# EAGLE board CT_schematic (EAGLE 7.6.0)

Size 100 x 80 mm. Coordinates in mm from the lower left corner, seen from the top.
Outline: 0,0 100,0 100,80 0,80 0,0
Copper layers (1*16): Top 0.035mm / dielectric 1.5mm / Bottom 0.035mm
Design rules "default": minimum track width 10mil, minimum drill 24mil, track to track 8mil, track to pad 8mil, pad to pad 8mil, via to via 8mil, smd to smd 8mil, copper to edge 40mil, drill to drill 8mil, minimum pad ring 10mil, minimum via ring 8mil, stop-mask expansion 4mil, vias tented up to drill 0mil, thermal gap 10mil

## Footprints (pad centres in the part's own frame; a part is rotated, then mirrored left to right if it is on the bottom)
C0603 = smd 0.8 x 0.8: 1 -0.762,0; 2 0.762,0
C0402 = smd 0.5 x 0.5: 1 -0.508,0; 2 0.508,0
C1210 = smd 1.2 x 2.5: 1 -1.524,0; 2 1.524,0
C0805 = smd 1.2 x 1.3: 1 -1.016,0; 2 1.016,0
R0603 = smd 0.8 x 0.8: 1 -0.762,0; 2 0.762,0
EXV-9H = smd 3.505 x 1.676: 1 -2.857,0; 2 2.857,0
PJ-037B_PACKAGE = drill 3.7 square: 1 12,0 | drill 3.2 square: 2 6,0
LQFP144 = smd 0.35 x 1.35: 1 -8.75,-10.625; 2 -8.25,-10.625; 3 -7.75,-10.625; 4 -7.25,-10.625; 5 -6.75,-10.625; 6 -6.25,-10.625; 7 -5.75,-10.625; 8 -5.25,-10.625; 9 -4.75,-10.625; 10 -4.25,-10.625; 11 -3.75,-10.625; 12 -3.25,-10.625; 13 -2.75,-10.62; 14 -2.25,-10.625; 15 -1.75,-10.625; 16 -1.25,-10.625; 17 -0.75,-10.625; 18 -0.25,-10.625; 19 0.25,-10.625; 20 0.75,-10.625; 21 1.25,-10.625; 22 1.75,-10.625; 23 2.25,-10.625; 24 2.75,-10.62; 25 3.25,-10.625; 26 3.75,-10.625; 27 4.25,-10.625; 28 4.75,-10.625; 29 5.25,-10.625; 30 5.75,-10.625; 31 6.25,-10.625; 32 6.75,-10.625; 33 7.25,-10.625; 34 7.75,-10.625; 35 8.25,-10.625; 36 8.75,-10.625; 73 8.75,10.625; 74 8.25,10.625; 75 7.75,10.625; 76 7.25,10.625; 77 6.75,10.625; 78 6.25,10.625; 79 5.75,10.625; 80 5.25,10.625; 81 4.75,10.625; 82 4.25,10.625; 83 3.75,10.625; 84 3.25,10.625; 85 2.75,10.625; 86 2.25,10.625; 87 1.75,10.625; 88 1.25,10.625; 89 0.75,10.625; 90 0.25,10.625; 91 -0.25,10.625; 92 -0.75,10.625; 93 -1.25,10.625; 94 -1.75,10.625; 95 -2.25,10.625; 96 -2.75,10.625; 97 -3.25,10.625; 98 -3.75,10.625; 99 -4.25,10.625; 100 -4.75,10.625; 101 -5.25,10.625; 102 -5.75,10.625; 103 -6.25,10.625; 104 -6.75,10.625; 105 -7.25,10.625; 106 -7.75,10.625; 107 -8.25,10.625; 108 -8.75,10.625 | smd 1.35 x 0.35: 37 10.625,-8.75; 38 10.625,-8.25; 39 10.625,-7.75; 40 10.625,-7.25; 41 10.625,-6.75; 42 10.625,-6.25; 43 10.625,-5.75; 44 10.625,-5.25; 45 10.625,-4.75; 46 10.625,-4.25; 47 10.625,-3.75; 48 10.625,-3.25; 49 10.625,-2.75; 50 10.625,-2.25; 51 10.625,-1.75; 52 10.625,-1.25; 53 10.625,-0.75; 54 10.625,-0.25; 55 10.625,0.25; 56 10.625,0.75; 57 10.625,1.25; 58 10.625,1.75; 59 10.625,2.25; 60 10.625,2.75; 61 10.625,3.25; 62 10.625,3.75; 63 10.625,4.25; 64 10.625,4.75; 65 10.625,5.25; 66 10.625,5.75; 67 10.625,6.25; 68 10.625,6.75; 69 10.625,7.25; 70 10.625,7.75; 71 10.625,8.25; 72 10.625,8.75; 109 -10.625,8.75; 110 -10.625,8.25; 111 -10.625,7.75; 112 -10.625,7.25; 113 -10.625,6.75; 114 -10.625,6.25; 115 -10.625,5.75; 116 -10.625,5.25; 117 -10.625,4.75; 118 -10.625,4.25; 119 -10.625,3.75; 120 -10.625,3.25; 121 -10.625,2.75; 122 -10.625,2.25; 123 -10.625,1.75; 124 -10.625,1.25; 125 -10.625,0.75; 126 -10.625,0.25; 127 -10.625,-0.25; 128 -10.625,-0.75; 129 -10.625,-1.25; 130 -10.625,-1.75; 131 -10.625,-2.25; 132 -10.625,-2.75; 133 -10.625,-3.25; 134 -10.625,-3.75; 135 -10.625,-4.25; 136 -10.625,-4.75; 137 -10.625,-5.25; 138 -10.625,-5.75; 139 -10.625,-6.25; 140 -10.625,-6.75; 141 -10.625,-7.25; 142 -10.625,-7.75; 143 -10.625,-8.25; 144 -10.625,-8.75
LGA14R35P5X6_200X200X100 = smd 0.35 x 0.15: 1 -0.8,0.525; 2 -0.8,0.175; 3 -0.8,-0.175; 4 -0.8,-0.525; 8 0.8,-0.525; 9 0.8,-0.175; 10 0.8,0.175; 11 0.8,0.525 | smd 0.15 x 0.35: 5 -0.35,-0.8; 6 0,-0.8; 7 0.35,-0.8; 12 0.35,0.8; 13 0,0.8; 14 -0.35,0.8
VFBGA48 = smd 0.35 x 0.35: A1 -1.875,2.625; A2 -1.125,2.625; A3 -0.375,2.625; A4 0.375,2.625; A5 1.125,2.625; A6 1.875,2.625; B1 -1.875,1.875; B2 -1.125,1.875; B3 -0.375,1.875; B4 0.375,1.875; B5 1.125,1.875; B6 1.875,1.875; C1 -1.875,1.125; C2 -1.125,1.125; C3 -0.375,1.125; C4 0.375,1.125; C5 1.125,1.125; C6 1.875,1.125; D1 -1.875,0.375; D2 -1.125,0.375; D3 -0.375,0.375; D4 0.375,0.375; D5 1.125,0.375; D6 1.875,0.375; E1 -1.875,-0.375; E2 -1.125,-0.375; E3 -0.375,-0.375; E4 0.375,-0.375; E5 1.125,-0.375; E6 1.875,-0.375; F1 -1.875,-1.125; F2 -1.125,-1.125; F3 -0.375,-1.125; F4 0.375,-1.125; F5 1.125,-1.125; F6 1.875,-1.125; G1 -1.875,-1.875; G2 -1.125,-1.875; G3 -0.375,-1.875; G4 0.375,-1.875; G5 1.125,-1.875; G6 1.875,-1.875; H1 -1.875,-2.625; H2 -1.125,-2.625; H3 -0.375,-2.625; H4 0.375,-2.625; H5 1.125,-2.625; H6 1.875,-2.625
WSON-6 = smd 0.4 x 0.6: 1 -1,-1.4; 2 0,-1.4; 3 1,-1.4; 4 1,1.4; 5 0,1.4; 6 -1,1.4 | drill 0.2 pad 0.3: P$1 0.95,0; P$2 -0.95,0; P$3 0,-0.5; P$4 0,0.5 | smd 2.4 x 1.5: PAD 0,0
SOIC-8 = smd 1.6 x 0.6: 1 -2.7,1.905 | smd 1.55 x 0.6: 2 -2.7,0.635; 3 -2.7,-0.635; 4 -2.7,-1.905; 5 2.7,-1.905; 6 2.7,-0.635; 7 2.7,0.635; 8 2.7,1.905
182-009-MALE = drill 1.194 pad 1.524 octagon: 1 -5.537,10.923; 2 -2.769,10.923; 3 0,10.923; 4 2.769,10.923; 5 5.537,10.923; 6 -4.153,8.08; 7 -1.384,8.08; 8 1.384,8.08; 9 4.153,8.08 | hole 3.048: -12.446,9.501; 12.446,9.501
QFN-32 = smd 0.6 x 0.3: 1 -2.3,1.75; 2 -2.3,1.25; 3 -2.3,0.75; 4 -2.3,0.25; 5 -2.3,-0.25; 6 -2.3,-0.75; 7 -2.3,-1.25; 8 -2.3,-1.75; 17 2.3,-1.75; 18 2.3,-1.25; 19 2.3,-0.75; 20 2.3,-0.25; 21 2.3,0.25; 22 2.3,0.75; 23 2.3,1.25; 24 2.3,1.75 | smd 0.3 x 0.6: 9 -1.75,-2.3; 10 -1.25,-2.3; 11 -0.75,-2.3; 12 -0.25,-2.3; 13 0.25,-2.3; 14 0.75,-2.3; 15 1.25,-2.3; 16 1.75,-2.3; 25 1.75,2.3; 26 1.25,2.3; 27 0.75,2.3; 28 0.25,2.3; 29 -0.25,2.3; 30 -0.75,2.3; 31 -1.25,2.3; 32 -1.75,2.3 | smd 3.2 x 3.2: EXP 0,0
SJ-43515TS-SMT-TR = smd 2.2 x 3: 1 0.6,-7.4; 4 3.4,-7.4 | smd 3 x 3: 2 12.8,-7.4; 5 17,-3 | smd 2 x 3: 3 5.3,0; 6 2.5,0 | drill 1.8: P$7 4.5,-3.69; P$8 11.54,-3.69
WM-64PC = drill 0.6 pad 1: 1 -1,0.95; 2 -1,-0.95
TSSOP20-I = smd 0.4 x 1.35: 1 -2.925,-2.875; 2 -2.275,-2.875; 3 -1.625,-2.875; 4 -0.975,-2.875; 5 -0.325,-2.875; 6 0.325,-2.875; 7 0.975,-2.875; 8 1.625,-2.875; 9 2.275,-2.875; 10 2.925,-2.875; 11 2.925,2.875; 12 2.275,2.875; 13 1.625,2.875; 14 0.975,2.875; 15 0.325,2.875; 16 -0.325,2.875; 17 -0.975,2.875; 18 -1.625,2.875; 19 -2.275,2.875; 20 -2.925,2.875
ABS07-32.768KHZ-7-T = smd 1.1 x 2.4: 1 -2.5,0; 2 0,0
ABLS-25.000MHZ-B2F-T = smd 5.6 x 2.8: 1 -3.81,0; 2 5.69,0
ASFL1 = smd 1.7 x 1.5: 1 -1.27,-1.1; 2 1.27,-1.1; 3 1.27,1.1; 4 -1.27,1.1
WSON-8 = smd 0.3 x 0.6: 1 -0.75,0; 2 0.05,0; 3 0.85,0; 4 1.65,0; 5 1.65,3.8; 6 0.85,3.8; 7 0.05,3.8; 8 -0.75,3.8 | smd 3 x 2.6: PAD 0.45,1.9
SON-6 = smd 0.55 x 0.3: 1 -0.355,0.5 | smd 0.52 x 0.3: 2 -0.37,0; 3 -0.37,-0.5; 4 0.37,-0.5; 5 0.37,0; 6 0.37,0.5
SW_4-1437565-2 = smd 1.4 x 2.1: 1 -2.23,4.55; 2 -2.23,-4.55; 3 2.23,4.55; 4 2.23,-4.55
LGM67K-G1J2-24-Z = smd 0.8 x 1.4: A -2,0; C 0,0
NC7SZ125M5X = smd 1.3 x 0.7: 1 -1.3,0.95; 2 -1.3,0; 3 -1.3,-0.95; 4 1.3,-0.95; 5 1.3,0.95

## Placement (x,y rotation side)
C1  1e-06  [C0603]  -62.23,100.33 0 top  (outside the outline)
C2  1e-07  [C0603]  -66.04,100.33 0 top  (outside the outline)
C3  1e-07  [C0603]  -69.85,100.33 0 top  (outside the outline)
C4  1e-07  [C0603]  -73.66,100.33 0 top  (outside the outline)
C5  1e-07  [C0603]  -77.47,100.33 0 top  (outside the outline)
C6  1e-07  [C0603]  -81.28,100.33 0 top  (outside the outline)
C7  1e-07  [C0603]  -85.09,100.33 0 top  (outside the outline)
C8  1e-07  [C0603]  -88.9,100.33 0 top  (outside the outline)
C9  1e-07  [C0603]  -92.71,100.33 0 top  (outside the outline)
C10  1e-07  [C0603]  -96.52,100.33 0 top  (outside the outline)
C11  1e-07  [C0603]  -15.24,105.41 0 top  (outside the outline)
C12  1e-07  [C0603]  -19.05,105.41 0 top  (outside the outline)
C13  1e-07  [C0603]  -22.86,105.41 0 top  (outside the outline)
C14  4.7e-06  [C0603]  -54.61,100.33 0 top  (outside the outline)
C15  1e-07  [C0603]  -26.67,105.41 0 top  (outside the outline)
C16  1e-07  [C0603]  -30.48,105.41 0 top  (outside the outline)
C17  1e-08  [C0603]  -34.29,105.41 0 top  (outside the outline)
C18  1e-06  [C0603]  -38.1,105.41 0 top  (outside the outline)
C19  1e-11  [C0402]  -49.53,110.49 0 top  (outside the outline)
C20  1e-11  [C0402]  -53.34,110.49 0 top  (outside the outline)
C21  1e-11  [C0402]  -57.15,110.49 0 top  (outside the outline)
C22  1e-11  [C0402]  -60.96,110.49 0 top  (outside the outline)
C23  1e-07  [C0402]  -64.77,110.49 0 top  (outside the outline)
C24  1e-07  [C0402]  -68.58,110.49 0 top  (outside the outline)
C25  1e-07  [C0402]  -72.39,110.49 0 top  (outside the outline)
C26  2.2e-06  [C0603]  -58.42,100.33 0 top  (outside the outline)
C27  1e-08  [C0402]  -76.2,110.49 0 top  (outside the outline)
C28  1e-06  [C0603]  -41.91,105.41 0 top  (outside the outline)
C29  1e-06  [C0603]  -45.72,105.41 0 top  (outside the outline)
C30  1e-06  [C0603]  -49.53,105.41 0 top  (outside the outline)
C31  1e-06  [C0603]  -53.34,105.41 0 top  (outside the outline)
C32  1e-06  [C0603]  -57.15,105.41 0 top  (outside the outline)
C33  1e-06  [C0603]  -60.96,105.41 0 top  (outside the outline)
C34  1e-06  [C0603]  -64.77,105.41 0 top  (outside the outline)
C35  1e-06  [C0603]  -68.58,105.41 0 top  (outside the outline)
C36  1e-06  [C0603]  -72.39,105.41 0 top  (outside the outline)
C37  1e-07  [C0402]  -80.01,110.49 0 top  (outside the outline)
C38  1e-07  [C0402]  -83.82,110.49 0 top  (outside the outline)
C39  1e-07  [C0402]  -87.63,110.49 0 top  (outside the outline)
C40  1e-07  [C0402]  -91.44,110.49 0 top  (outside the outline)
C41  1e-06  [C0603]  -76.2,105.41 0 top  (outside the outline)
C42  1e-07  [C0402]  -95.25,110.49 0 top  (outside the outline)
C43  1e-07  [C0402]  -99.06,110.49 0 top  (outside the outline)
C44  1e-07  [C0402]  -15.24,115.57 0 top  (outside the outline)
C45  1e-07  [C0402]  -19.05,115.57 0 top  (outside the outline)
C46  1e-07  [C0402]  -22.86,115.57 0 top  (outside the outline)
C47  1e-07  [C0402]  -26.67,115.57 0 top  (outside the outline)
C48  1e-08  [C0402]  -30.48,115.57 0 top  (outside the outline)
C49  1e-08  [C0402]  -34.29,115.57 0 top  (outside the outline)
C50  1e-05  [C1210]  -38.1,93.98 0 top  (outside the outline)
C51  1e-05  [C0805]  -68.58,93.98 0 top  (outside the outline)
C52  1e-08  [C0402]  -38.1,115.57 0 top  (outside the outline)
C53  1e-05  [C1210]  -44.45,93.98 0 top  (outside the outline)
C54  1e-05  [C1210]  -50.8,93.98 0 top  (outside the outline)
C55  8e-07  [R0603]  -80.01,105.41 0 top  (outside the outline)
C56  1e-05  [C1210]  -57.15,93.98 0 top  (outside the outline)
C57  1e-07  [C0402]  -41.91,115.57 0 top  (outside the outline)
C58  0.0001  [EXV-9H]  -43.18,86.36 0 top  (outside the outline)
C59  0.0001  [EXV-9H]  -54.61,86.36 0 top  (outside the outline)
C60  1e-08  [C0402]  -45.72,115.57 0 top  (outside the outline)
J1  PJ-037B  [PJ-037B_PACKAGE]  -83.82,52.07 0 top  (outside the outline)
R2  1000.0  [R0603]  -83.82,105.41 0 top  (outside the outline)
R4  4700.0  [R0603]  -87.63,105.41 0 top  (outside the outline)
R5  2200.0  [R0603]  -91.44,105.41 0 top  (outside the outline)
R6  2200.0  [R0603]  -95.25,105.41 0 top  (outside the outline)
R7  2200.0  [R0603]  -99.06,105.41 0 top  (outside the outline)
R8  2200.0  [R0603]  -15.24,110.49 0 top  (outside the outline)
R9  10000.0  [R0603]  -20.32,100.33 0 top  (outside the outline)
R10  10000.0  [R0603]  -25.4,100.33 0 top  (outside the outline)
R11  10000.0  [R0603]  -30.48,100.33 0 top  (outside the outline)
R12  10000.0  [R0603]  -35.56,100.33 0 top  (outside the outline)
R13  10000.0  [R0603]  -40.64,100.33 0 top  (outside the outline)
R14  120.0  [R0603]  -19.05,110.49 0 top  (outside the outline)
R15  1270.0  [R0603]  -22.86,110.49 0 top  (outside the outline)
R16  1270.0  [R0603]  -26.67,110.49 0 top  (outside the outline)
R17  100000.0  [R0603]  -73.66,92.71 0 top  (outside the outline)
R18  200.0  [R0603]  -30.48,110.49 0 top  (outside the outline)
R19  1000.0  [R0603]  -34.29,110.49 0 top  (outside the outline)
R20  100000.0  [R0603]  -78.74,92.71 0 top  (outside the outline)
R21  2231.0  [R0603]  -38.1,110.49 0 top  (outside the outline)
R22  1000.0  [R0603]  -41.91,110.49 0 top  (outside the outline)
R23  100000.0  [R0603]  -83.82,92.71 0 top  (outside the outline)
R24  300000.0  [R0603]  -88.9,92.71 0 top  (outside the outline)
R25  100000.0  [R0603]  -93.98,92.71 0 top  (outside the outline)
R26  10000.0  [R0603]  -45.72,100.33 0 top  (outside the outline)
R27  10000.0  [R0603]  -50.8,100.33 0 top  (outside the outline)
R28  9100.0  [R0603]  -45.72,110.49 0 top  (outside the outline)
R29  680000.0  [R0603]  -99.06,92.71 0 top  (outside the outline)
R30  120000.0  [R0603]  -15.24,100.33 0 top  (outside the outline)
U1  STM32L471ZGT6  [LQFP144]  -24.13,11.43 0 top  (outside the outline)
U2  BMC150  [LGA14R35P5X6_200X200X100]  -33.02,93.98 0 top  (outside the outline)
U3  CY62147GE30-45BVXI  [VFBGA48]  -29.21,66.04 0 top  (outside the outline)
U4  HDC1080DMBR  [WSON-6]  -34.29,86.36 0 top  (outside the outline)
U5  MCP2562-E/SN  [SOIC-8]  -21.59,77.47 0 top  (outside the outline)
U6  182-009-113R531  [182-009-MALE]  -59.69,6.35 0 top  (outside the outline)
U7  SGTL5000XNAA3  [QFN-32]  -87.63,64.77 0 top  (outside the outline)
U8  SJ-43515TS-SMT-TR  [SJ-43515TS-SMT-TR]  -78.74,33.02 0 top  (outside the outline)
U9  SJ-43515TS-SMT-TR  [SJ-43515TS-SMT-TR]  -39.37,54.61 0 top  (outside the outline)
U10  SJ-43515TS-SMT-TR  [SJ-43515TS-SMT-TR]  -67.31,54.61 0 top  (outside the outline)
U11  WM-64PCT  [WM-64PC]  -73.66,64.77 0 top  (outside the outline)
U12  SP3203ECY-L/TR  [TSSOP20-I]  -62.23,64.77 0 top  (outside the outline)
U13  182-009-113R531  [182-009-MALE]  -36.83,29.21 0 top  (outside the outline)
U14  ABS07-32.768KHZ-7-T  [ABS07-32.768KHZ-7-T]  -96.52,86.36 0 top  (outside the outline)
U15  ABLS-25.000MHZ-B2F-T  [ABLS-25.000MHZ-B2F-T]  -73.66,86.36 0 top  (outside the outline)
U16  ASFL-24.57MHZ-NCS  [ASFL1]  -27.94,86.36 0 top  (outside the outline)
U17  LP3878SDX-ADJ/NOPB  [WSON-8]  -43.18,74.93 0 top  (outside the outline)
U18  LP3878SDX-ADJ/NOPB  [WSON-8]  -63.5,74.93 0 top  (outside the outline)
U19  LP2951ACSDX/NOPB  [WSON-8]  -81.28,74.93 0 top  (outside the outline)
U20  TPS3895ADRYR  [SON-6]  -48.26,114.3 0 top  (outside the outline)
U21  4-1437565-2  [SW_4-1437565-2]  -46.99,66.04 0 top  (outside the outline)
U22  Q65110A2395  [LGM67K-G1J2-24-Z]  -17.78,93.98 0 top  (outside the outline)
U23  nc7sz125m5x  [NC7SZ125M5X]  -62.23,92.71 0 top  (outside the outline)

## Library data of the parts
C1-C60 J1 R2 R4-R30 U1-U23 = circuit_tree

## Nets
CLK_CRYSTAL_U1_8: C19.1 U1.8 U14.1
CLK_CRYSTAL_U1_9: C20.1 U1.9 U14.2
CLK_CRYSTAL_U1_23: C21.1 U1.23 U15.1
CLK_CRYSTAL_U1_24: C22.1 U1.24 U15.2
CLK_U7_21: U7.21 U16.3
GND: C1.2 C2.2 C3.2 C4.2 C5.2 C6.2 C7.2 C8.2 C9.2 C10.2 C11.2 C12.2 C13.2 C14.2 C15.2 C16.2 C17.2 C18.2 C19.2 C20.2 C21.2 C22.2 C23.2 C24.2 C25.2 C26.2 C27.2 C28.2 C29.2 C37.2 C38.2 C39.2 C40.2 C41.2 C42.2 C43.2 C46.2 C47.2 C48.2 C49.2 C50.2 C51.2 C52.2 C53.2 C54.2 C55.2 C56.2 C57.2 C58.2 C59.2 C60.2 J1.2 R2.2 R9.2 R16.2 R19.2 R22.2 R25.2 R28.2 R30.2 U1.16 U1.30 U1.31 U1.38 U1.51 U1.61 U1.71 U1.83 U1.94 U1.107 U1.120 U1.130 U1.143 U2.1 U2.6 U2.7 U2.9 U3.D1 U3.E6 U4.2 U4.PAD U5.2 U5.8 U6.5 U7.1 U7.3 U7.7 U7.EXP U9.1 U10.1 U11.2 U12.18 U13.5 U16.2 U17.3 U17.PAD U18.3 U18.PAD U19.3 U19.4 U19.PAD U20.2 U22.C U23.1 U23.3
NET_U1_25: R4.1 U1.25 U23.4
NET_U1_69: R7.1 U1.69 U2.11
NET_U1_70: R8.1 U1.70 U2.14
NET_U1_128: R6.1 U1.128 U4.1
NET_U1_129: R5.1 U1.129 U4.6
NET_U1_138: R9.1 U1.138
NET_U1_140: U22.A
NET_U1_142: U21.3 U21.4
NET_U5_6: R14.2 U5.6
NET_U6_2: R14.2 U5.6 U6.2
NET_U6_3: R14.1 U5.7 U6.3
NET_U7_10: C40.1 U7.10
NET_U7_29: R15.1 U7.29
NET_U7_31: R16.1 U7.31
NET_U8_1: U7.4 U8.1
NET_U8_2: U7.2 U8.2
NET_U8_5: U7.6 U8.5
NET_U9_2: C31.1 U9.2
NET_U9_5: C30.1 U9.5
NET_U9_11: C31.2
NET_U9_12: C30.2
NET_U10_2: C33.1 C34.1 U10.2
NET_U10_5: C32.1 U10.5
NET_U10_13: C33.2 C34.2
NET_U10_14: C32.2
NET_U11_1: C35.1 C36.1 C41.1 U7.16 U11.1
NET_U11_15: C35.2 C36.2
NET_U12_1: C44.1 U12.1
NET_U12_2: C46.1 U12.2
NET_U12_3: C44.2 U12.3
NET_U12_4: C45.1 U12.4
NET_U12_5: C45.2 U12.5
NET_U12_6: C47.1 U12.6
NET_U12_20: U12.20
NET_U13_2: U12.14 U13.2
NET_U13_3: U12.17 U13.3
NET_U13_7: U12.13 U13.7
NET_U13_8: U12.16 U13.8
NET_U17_1: C49.1 U17.1
NET_U17_6: R18.2 R19.1 U17.6
NET_U17_8: R17.1 U17.8
NET_U18_1: C52.1 U18.1
NET_U18_6: R21.2 R22.1 U18.6
NET_U18_8: R20.1 U18.8
NET_U19_5: R23.1 U19.5
NET_U19_7: R24.2 R25.1 U19.7
NET_U20_1: R27.1 R28.1 U20.1
NET_U20_3: R29.2 R30.1 U20.3
NET_U20_4: R26.1 U20.4 U23.2
NET_U21_1: R2.1 U21.1 U21.2
PROC_CAN1_RX: U1.103 U5.4
PROC_CAN1_TX: U1.104 U5.1
PROC_FMC_A0: U1.10 U3.A3
PROC_FMC_A1: U1.11 U3.A4
PROC_FMC_A2: U1.12 U3.A5
PROC_FMC_A3: U1.13 U3.B3
PROC_FMC_A4: U1.14 U3.B4
PROC_FMC_A5: U1.15 U3.C3
PROC_FMC_A6: U1.50 U3.C4
PROC_FMC_A7: U1.53 U3.D4
PROC_FMC_A8: U1.54 U3.H2
PROC_FMC_A9: U1.55 U3.H3
PROC_FMC_A10: U1.56 U3.H4
PROC_FMC_A11: U1.57 U3.H5
PROC_FMC_A12: U1.87 U3.G3
PROC_FMC_A13: U1.88 U3.G4
PROC_FMC_A14: U1.89 U3.F3
PROC_FMC_A15: U1.90 U3.F4
PROC_FMC_A16: U1.80 U3.E4
PROC_FMC_A17: U1.81 U3.D3
PROC_FMC_D0: U1.85 U3.B6
PROC_FMC_D1: U1.86 U3.C5
PROC_FMC_D2: U1.114 U3.C6
PROC_FMC_D3: U1.115 U3.D5
PROC_FMC_D4: U1.58 U3.E5
PROC_FMC_D5: U1.59 U3.F5
PROC_FMC_D6: U1.60 U3.F6
PROC_FMC_D7: U1.63 U3.G6
PROC_FMC_D8: U1.64 U3.B1
PROC_FMC_D9: U1.65 U3.C1
PROC_FMC_D10: U1.66 U3.C2
PROC_FMC_D11: U1.67 U3.D2
PROC_FMC_D12: U1.68 U3.E2
PROC_FMC_D13: U1.77 U3.F2
PROC_FMC_D14: U1.78 U3.F1
PROC_FMC_D15: U1.79 U3.G1
PROC_FMC_NBL0: U1.141 U3.A1
PROC_FMC_NE2: R12.1 U1.124 U3.B5
PROC_FMC_NOE: R11.1 U1.118 U3.A2
PROC_FMC_NWE: R13.1 U1.119 U3.G5
PROC_LPUART1_CTS: U1.74 U12.8
PROC_LPUART1_RTS: U1.73 U12.10
PROC_LPUART1_RX: U1.26 U12.11
PROC_LPUART1_TX: U1.27 U12.7
PROC_SAI1_FS_A: U1.3 U7.23
PROC_SAI1_SCK_A: U1.4 U7.24
PROC_SAI1_SD_A: U1.5 U7.26
VCC_S1_15V2: C50.1 C53.1 C55.1 C58.1 C59.1 J1.1 R17.2 R20.2 U17.4 U18.4 U19.8
VCC_TIER1_1V2: C37.1 C51.1 R18.1 U7.30 U17.5
VCC_TIER1_3V3: C1.1 C2.1 C3.1 C4.1 C5.1 C6.1 C7.1 C8.1 C9.1 C10.1 C11.1 C12.1 C13.1 C14.1 C15.1 C16.1 C17.1 C18.1 C23.1 C24.1 C25.1 C26.1 C27.1 C29.1 C38.1 C39.1 C42.1 C43.1 C48.1 C54.1 C57.1 C60.1 R4.2 R5.2 R6.2 R7.2 R8.2 R10.1 R10.2 R11.2 R12.2 R13.2 R15.2 R21.1 R26.2 R27.2 R29.1 U1.6 U1.17 U1.32 U1.33 U1.39 U1.52 U1.62 U1.72 U1.84 U1.95 U1.106 U1.108 U1.121 U1.131 U1.144 U2.8 U2.10 U2.12 U2.13 U3.D6 U3.E1 U4.5 U5.5 U7.5 U7.20 U12.12 U12.19 U16.4 U18.5 U20.6 U23.5
VCC_TIER1_5V0: C28.1 C56.1 R23.2 R24.1 U5.3 U19.1

## Tracks (layer width: path | path; a pad name or v marks a point on that pad's centre or on a via)
CLK_CRYSTAL_U1_8  (2 unrouted)
CLK_CRYSTAL_U1_9  (2 unrouted)
CLK_CRYSTAL_U1_23  (2 unrouted)
CLK_CRYSTAL_U1_24  (2 unrouted)
CLK_U7_21  (1 unrouted)
GND  (104 unrouted)
NET_U1_25  (2 unrouted)
NET_U1_69  (2 unrouted)
NET_U1_70  (2 unrouted)
NET_U1_128  (2 unrouted)
NET_U1_129  (2 unrouted)
NET_U1_138  (1 unrouted)
NET_U1_142  (1 unrouted)
NET_U5_6  (1 unrouted)
NET_U6_2  (2 unrouted)
NET_U6_3  (2 unrouted)
NET_U7_10  (1 unrouted)
NET_U7_29  (1 unrouted)
NET_U7_31  (1 unrouted)
NET_U8_1  (1 unrouted)
NET_U8_2  (1 unrouted)
NET_U8_5  (1 unrouted)
NET_U9_2  (1 unrouted)
NET_U9_5  (1 unrouted)
NET_U10_2  (2 unrouted)
NET_U10_5  (1 unrouted)
NET_U10_13  (1 unrouted)
NET_U11_1  (4 unrouted)
NET_U11_15  (1 unrouted)
NET_U12_1  (1 unrouted)
NET_U12_2  (1 unrouted)
NET_U12_3  (1 unrouted)
NET_U12_4  (1 unrouted)
NET_U12_5  (1 unrouted)
NET_U12_6  (1 unrouted)
NET_U13_2  (1 unrouted)
NET_U13_3  (1 unrouted)
NET_U13_7  (1 unrouted)
NET_U13_8  (1 unrouted)
NET_U17_1  (1 unrouted)
NET_U17_6  (2 unrouted)
NET_U17_8  (1 unrouted)
NET_U18_1  (1 unrouted)
NET_U18_6  (2 unrouted)
NET_U18_8  (1 unrouted)
NET_U19_5  (1 unrouted)
NET_U19_7  (2 unrouted)
NET_U20_1  (2 unrouted)
NET_U20_3  (2 unrouted)
NET_U20_4  (2 unrouted)
NET_U21_1  (2 unrouted)
PROC_CAN1_RX  (1 unrouted)
PROC_CAN1_TX  (1 unrouted)
PROC_FMC_A0  (1 unrouted)
PROC_FMC_A1  (1 unrouted)
PROC_FMC_A2  (1 unrouted)
PROC_FMC_A3  (1 unrouted)
PROC_FMC_A4  (1 unrouted)
PROC_FMC_A5  (1 unrouted)
PROC_FMC_A6  (1 unrouted)
PROC_FMC_A7  (1 unrouted)
PROC_FMC_A8  (1 unrouted)
PROC_FMC_A9  (1 unrouted)
PROC_FMC_A10  (1 unrouted)
PROC_FMC_A11  (1 unrouted)
PROC_FMC_A12  (1 unrouted)
PROC_FMC_A13  (1 unrouted)
PROC_FMC_A14  (1 unrouted)
PROC_FMC_A15  (1 unrouted)
PROC_FMC_A16  (1 unrouted)
PROC_FMC_A17  (1 unrouted)
PROC_FMC_D0  (1 unrouted)
PROC_FMC_D1  (1 unrouted)
PROC_FMC_D2  (1 unrouted)
PROC_FMC_D3  (1 unrouted)
PROC_FMC_D4  (1 unrouted)
PROC_FMC_D5  (1 unrouted)
PROC_FMC_D6  (1 unrouted)
PROC_FMC_D7  (1 unrouted)
PROC_FMC_D8  (1 unrouted)
PROC_FMC_D9  (1 unrouted)
PROC_FMC_D10  (1 unrouted)
PROC_FMC_D11  (1 unrouted)
PROC_FMC_D12  (1 unrouted)
PROC_FMC_D13  (1 unrouted)
PROC_FMC_D14  (1 unrouted)
PROC_FMC_D15  (1 unrouted)
PROC_FMC_NBL0  (1 unrouted)
PROC_FMC_NE2  (2 unrouted)
PROC_FMC_NOE  (2 unrouted)
PROC_FMC_NWE  (2 unrouted)
PROC_LPUART1_CTS  (1 unrouted)
PROC_LPUART1_RTS  (1 unrouted)
PROC_LPUART1_RX  (1 unrouted)
PROC_LPUART1_TX  (1 unrouted)
PROC_SAI1_FS_A  (1 unrouted)
PROC_SAI1_SCK_A  (1 unrouted)
PROC_SAI1_SD_A  (1 unrouted)
VCC_S1_15V2  (10 unrouted)
VCC_TIER1_1V2  (4 unrouted)
VCC_TIER1_3V3  (77 unrouted)
VCC_TIER1_5V0  (5 unrouted)